# Altium PCB e3rev2.PcbDoc (part 2 of 2)
Units mm, origin at the board's own origin, x right, y up, seen from the top; angles counter-clockwise.
Board outline 65 x 49 mm, 4 copper layers (Top Layer, Int1 (GND), Int2 (PWR), Bottom Layer), stack 1.57 mm thick; 59 components, 45 nets, 231 pads, 138 vias.
Unrouted connection lines stored in the file: 2.
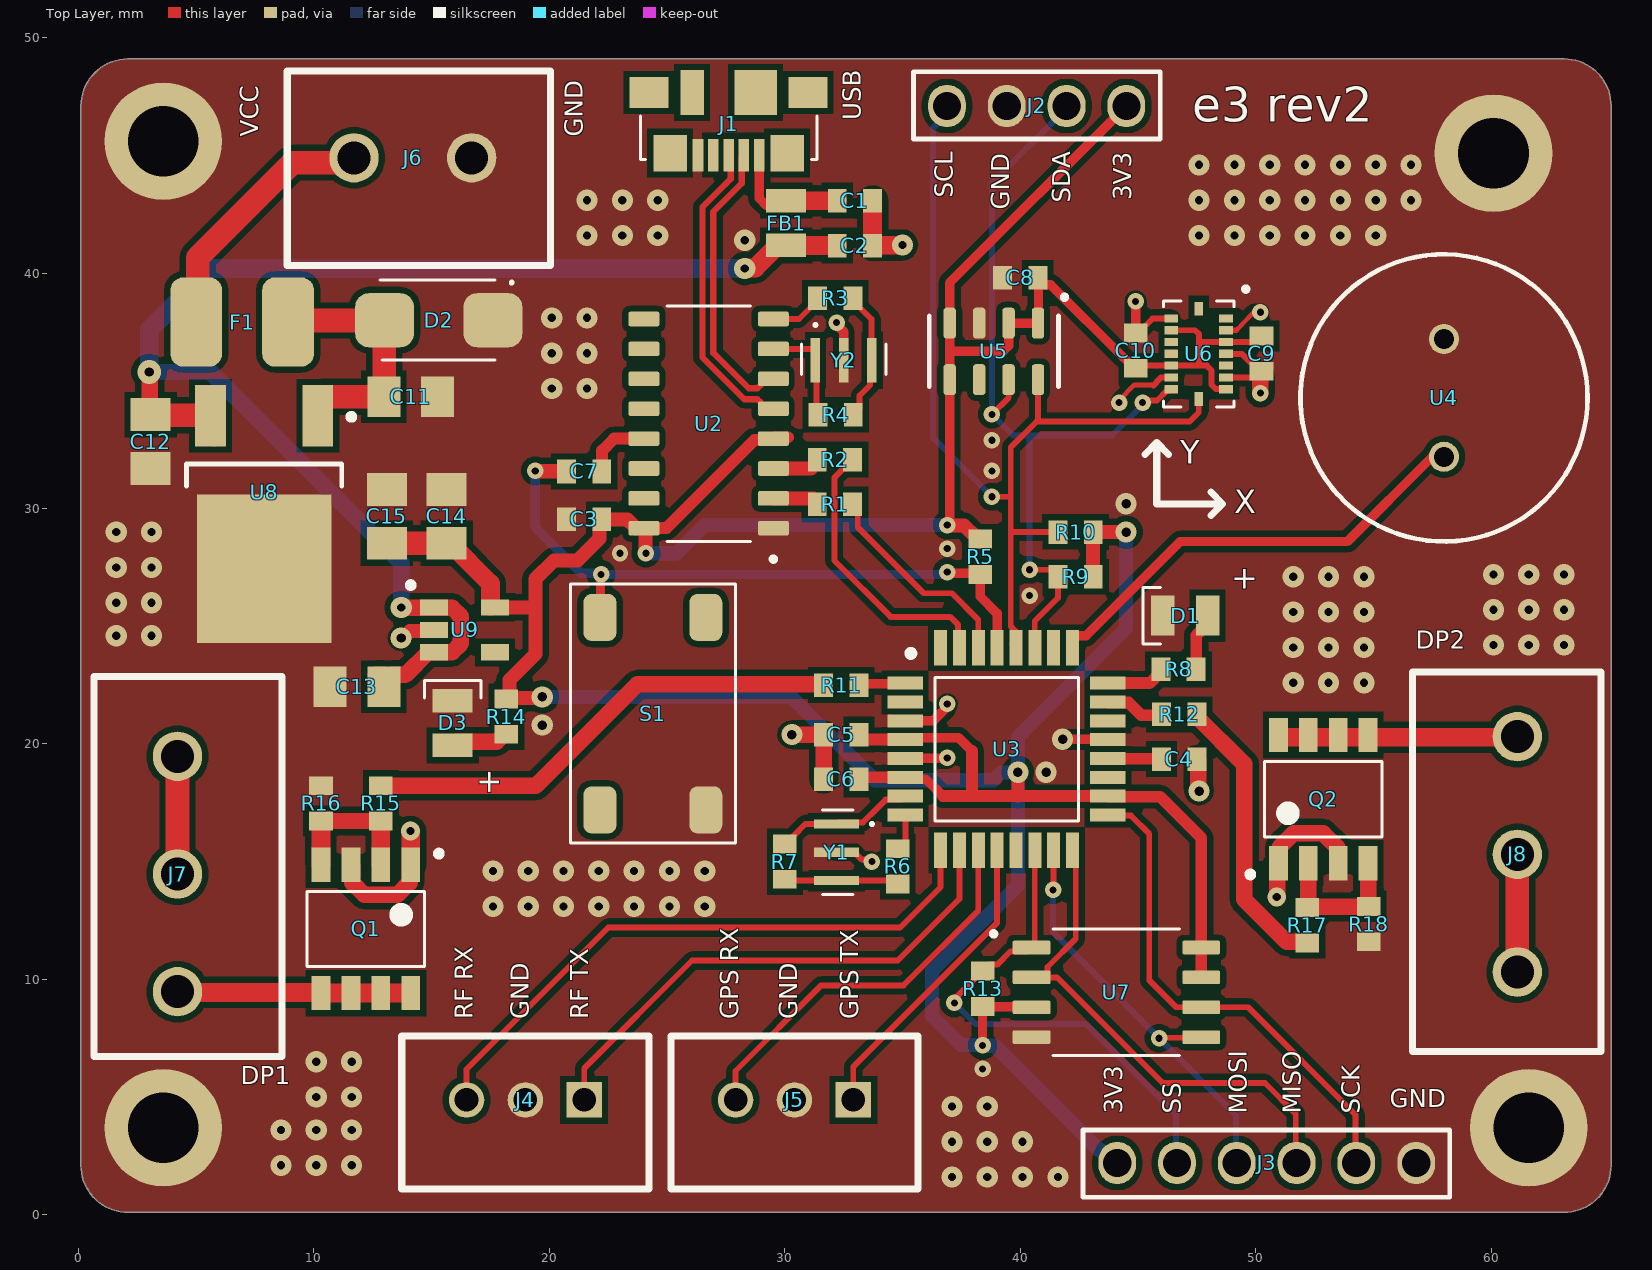
[diagram p0: Top Layer view]

## Polygon pours and split planes (outlines as drawn) (continued)
GND on Bottom Layer "GND_L04_P003" (solid, pour order 3): 2.1,0.1 cw(c2.1,2.1) 0.1,2.1 0.1,47.1 cw(c2.1,47.1) 2.1,49.1 63.1,49.1 cw(c63.1,47.1) 65.1,47.1 65.1,2.1 cw(c63.1,2.1) 63.1,0.1

## Silkscreen, mask and mechanical layers (free items; w line width, h text height)
Top Overlay:
  lines w0.3: 45.3,32.3 45.8,32.8 46.3,32.3 ; 45.8,32.7 45.8,30.2 48.6,30.2 ; 48.1,29.7 48.6,30.2 ; 48.1,30.7 48.6,30.2
  text "USB" at 33.481,46.5 h1.3 r90
  text "e3 rev2" at 47.3,45.937 h2.5
  text "VCC" at 7.881,45.8 h1.3 r90
  text "GND" at 21.681,45.8 h1.3 r90
  text "SCL" at 37.381,43.2 h1.3 r90
  text "3V3" at 44.981,43.1 h1.3 r90
  text "SDA" at 42.381,43 h1.3 r90
  text "GND" at 39.781,42.7 h1.3 r90
  text "Y" at 46.8,31.9 h1
  text "X" at 49.1,29.8 h1
  text "DP2" at 56.8,23.8 h1.3
  text "RF RX" at 17,8.3 h1.3 r90
  text "GND" at 19.381,8.3 h1.3 r90
  text "RF TX" at 21.9,8.3 h1.3 r90
  text "GPS RX" at 28.281,8.3 h1.3 r90
  text "GND" at 30.781,8.3 h1.3 r90
  text "GPS TX" at 33.381,8.3 h1.3 r90
  text "DP1" at 6.9,5.3 h1.3
  text "GND" at 55.7,4.319 h1.3
  text "3V3" at 44.581,4.3 h1.3 r90
  text "SS" at 47.081,4.3 h1.3 r90
  text "MOSI" at 49.881,4.3 h1.3 r90
  text "MISO" at 52.181,4.3 h1.3 r90
  text "SCK" at 54.681,4.3 h1.3 r90
Mechanical 1:
  the board outline again, w0.127

## Text inside footprints (layer, text, board x,y; h text height)
D1: Top Overlay "+" at 48.96,26.602 h1
D3: Top Overlay "+" at 17.038,18.941 h1 r270